# Altium PCB Parallel_CS.PcbDoc (part 1 of 3)
Units mm, origin at the board's own origin, x right, y up, seen from the top; angles counter-clockwise.
Board outline 81.03 x 171.07 mm, 4 copper layers (Top Layer, Ground Plane, Power Plane, Bottom Layer), stack 0.778 mm thick; 393 components, 189 nets, 1068 pads, 234 vias.
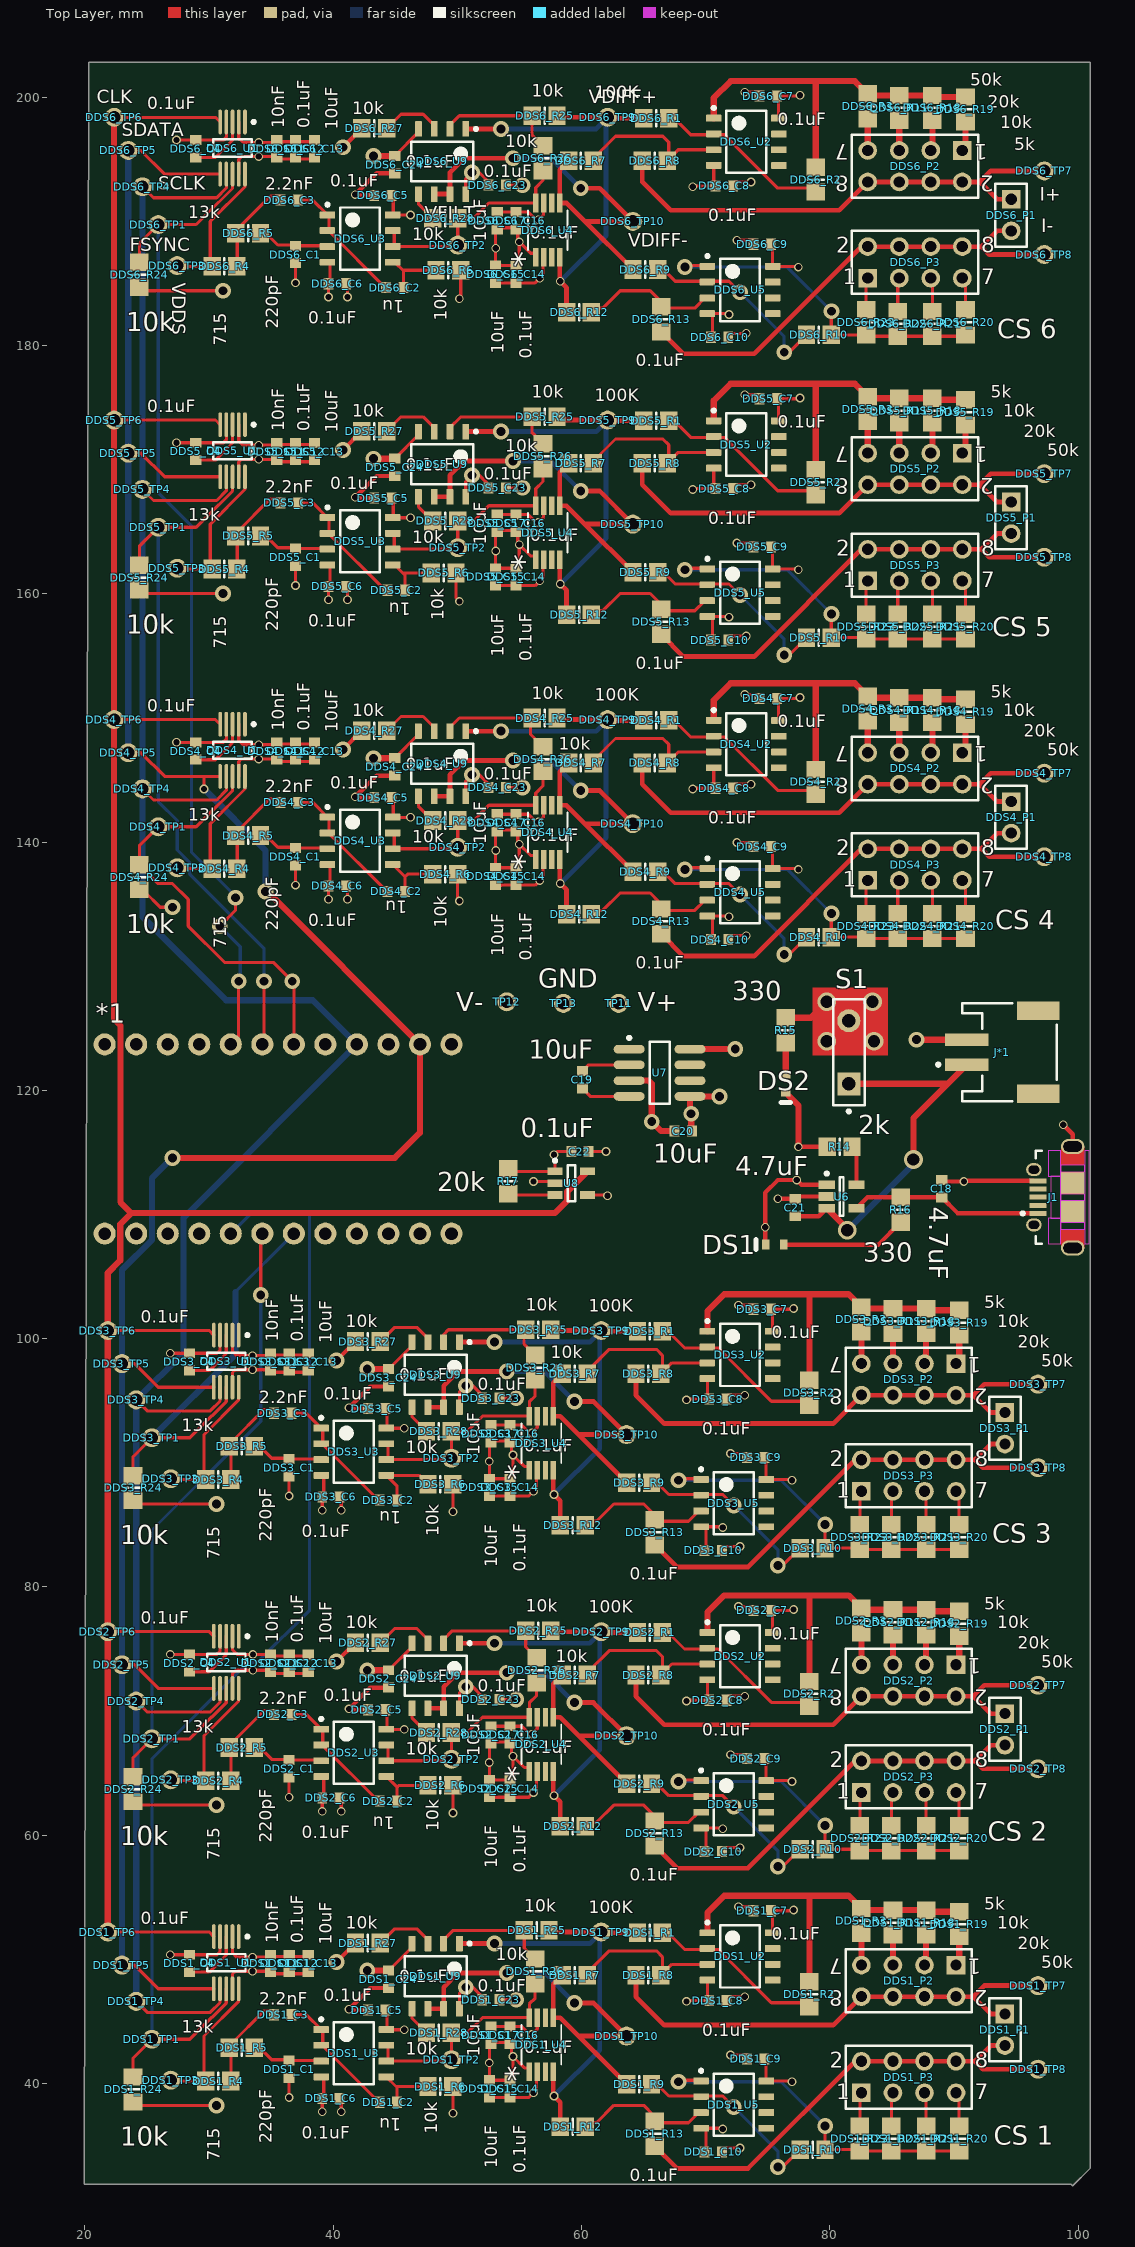
[diagram p0: Top Layer view]
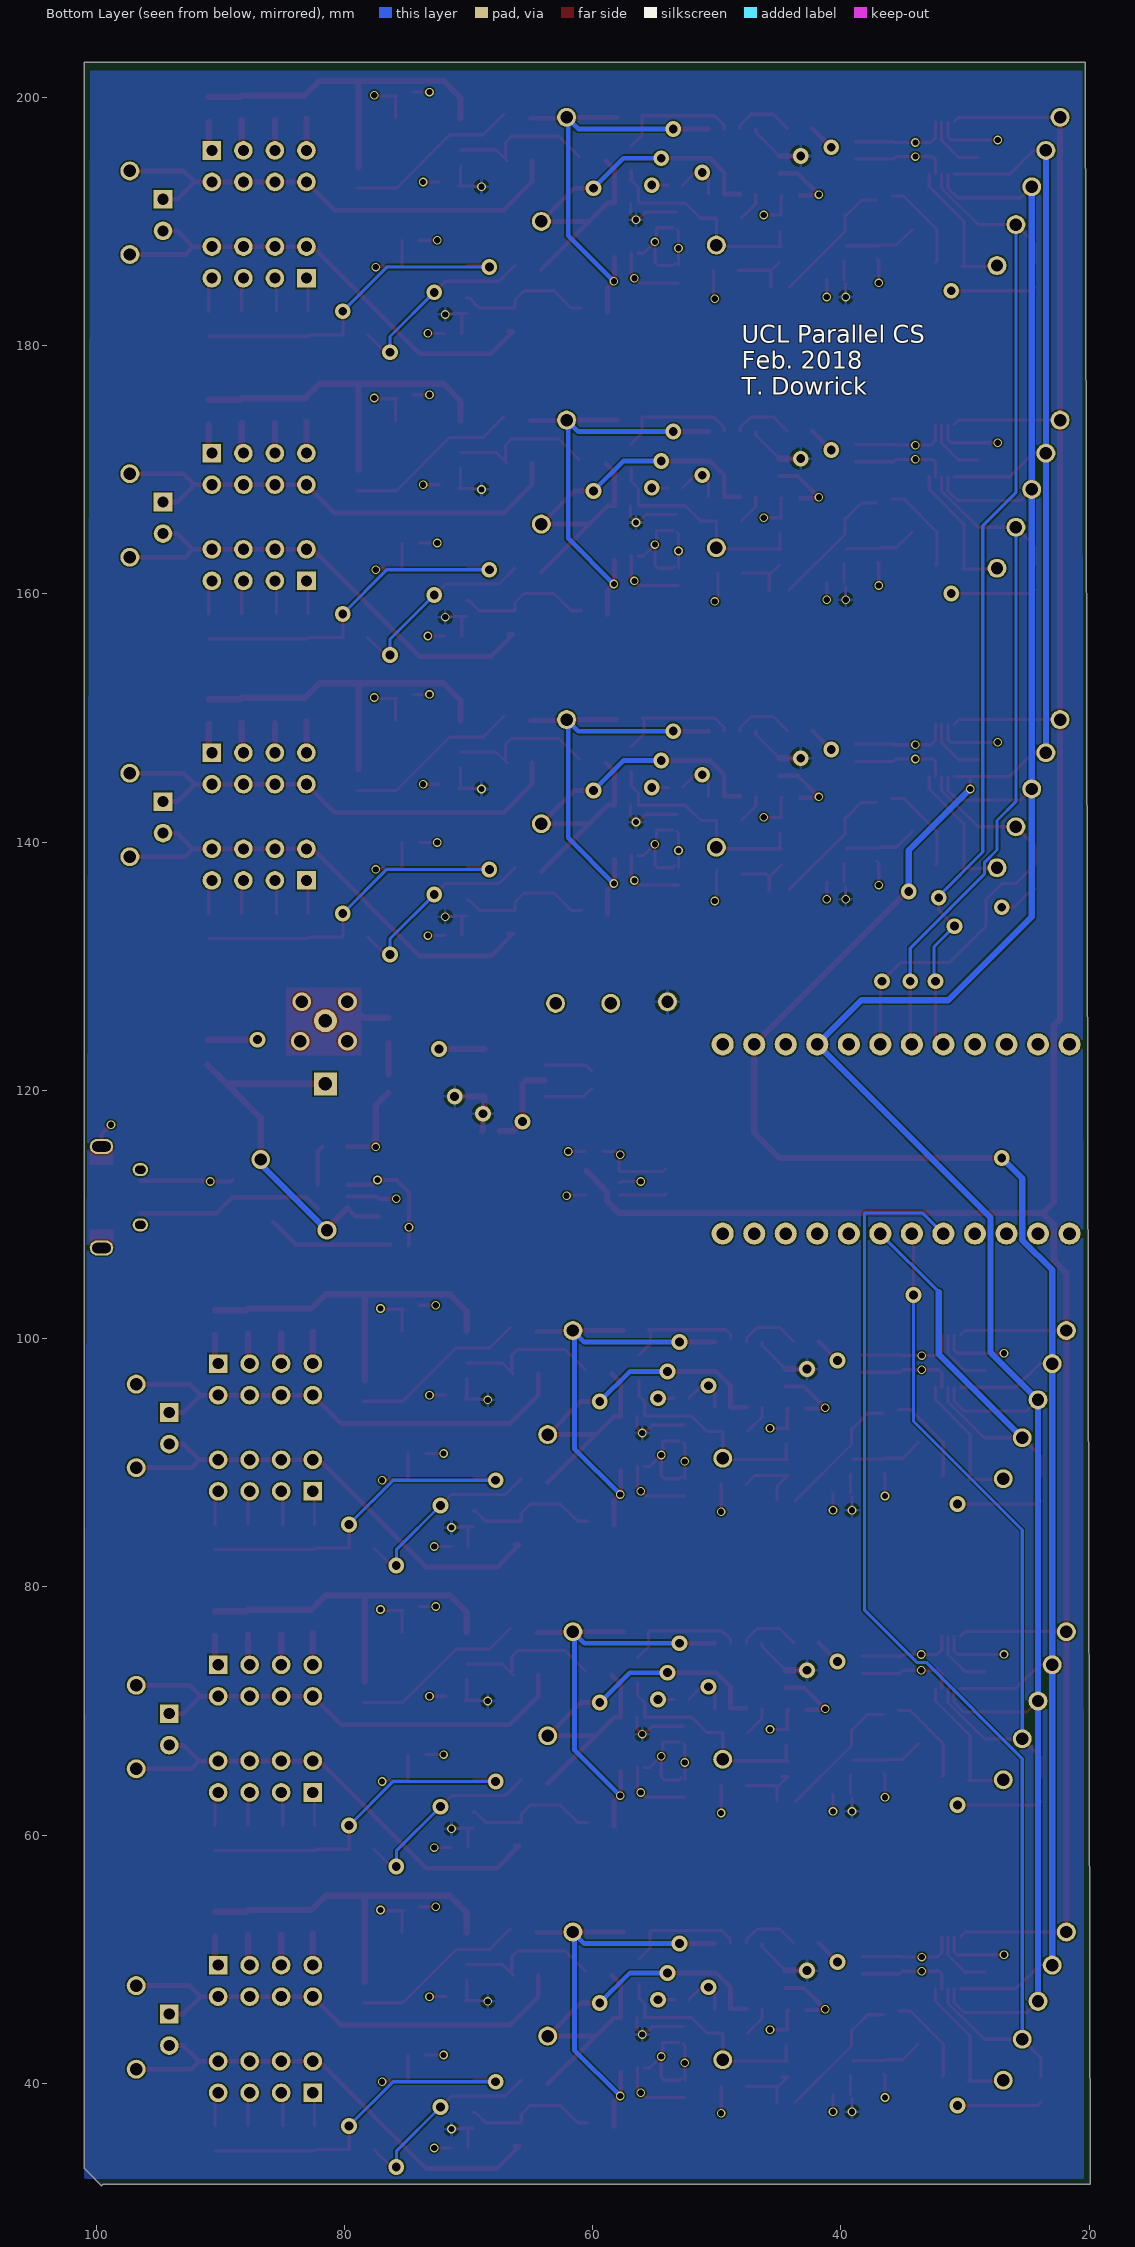
[diagram p1: Bottom Layer view, seen from below]
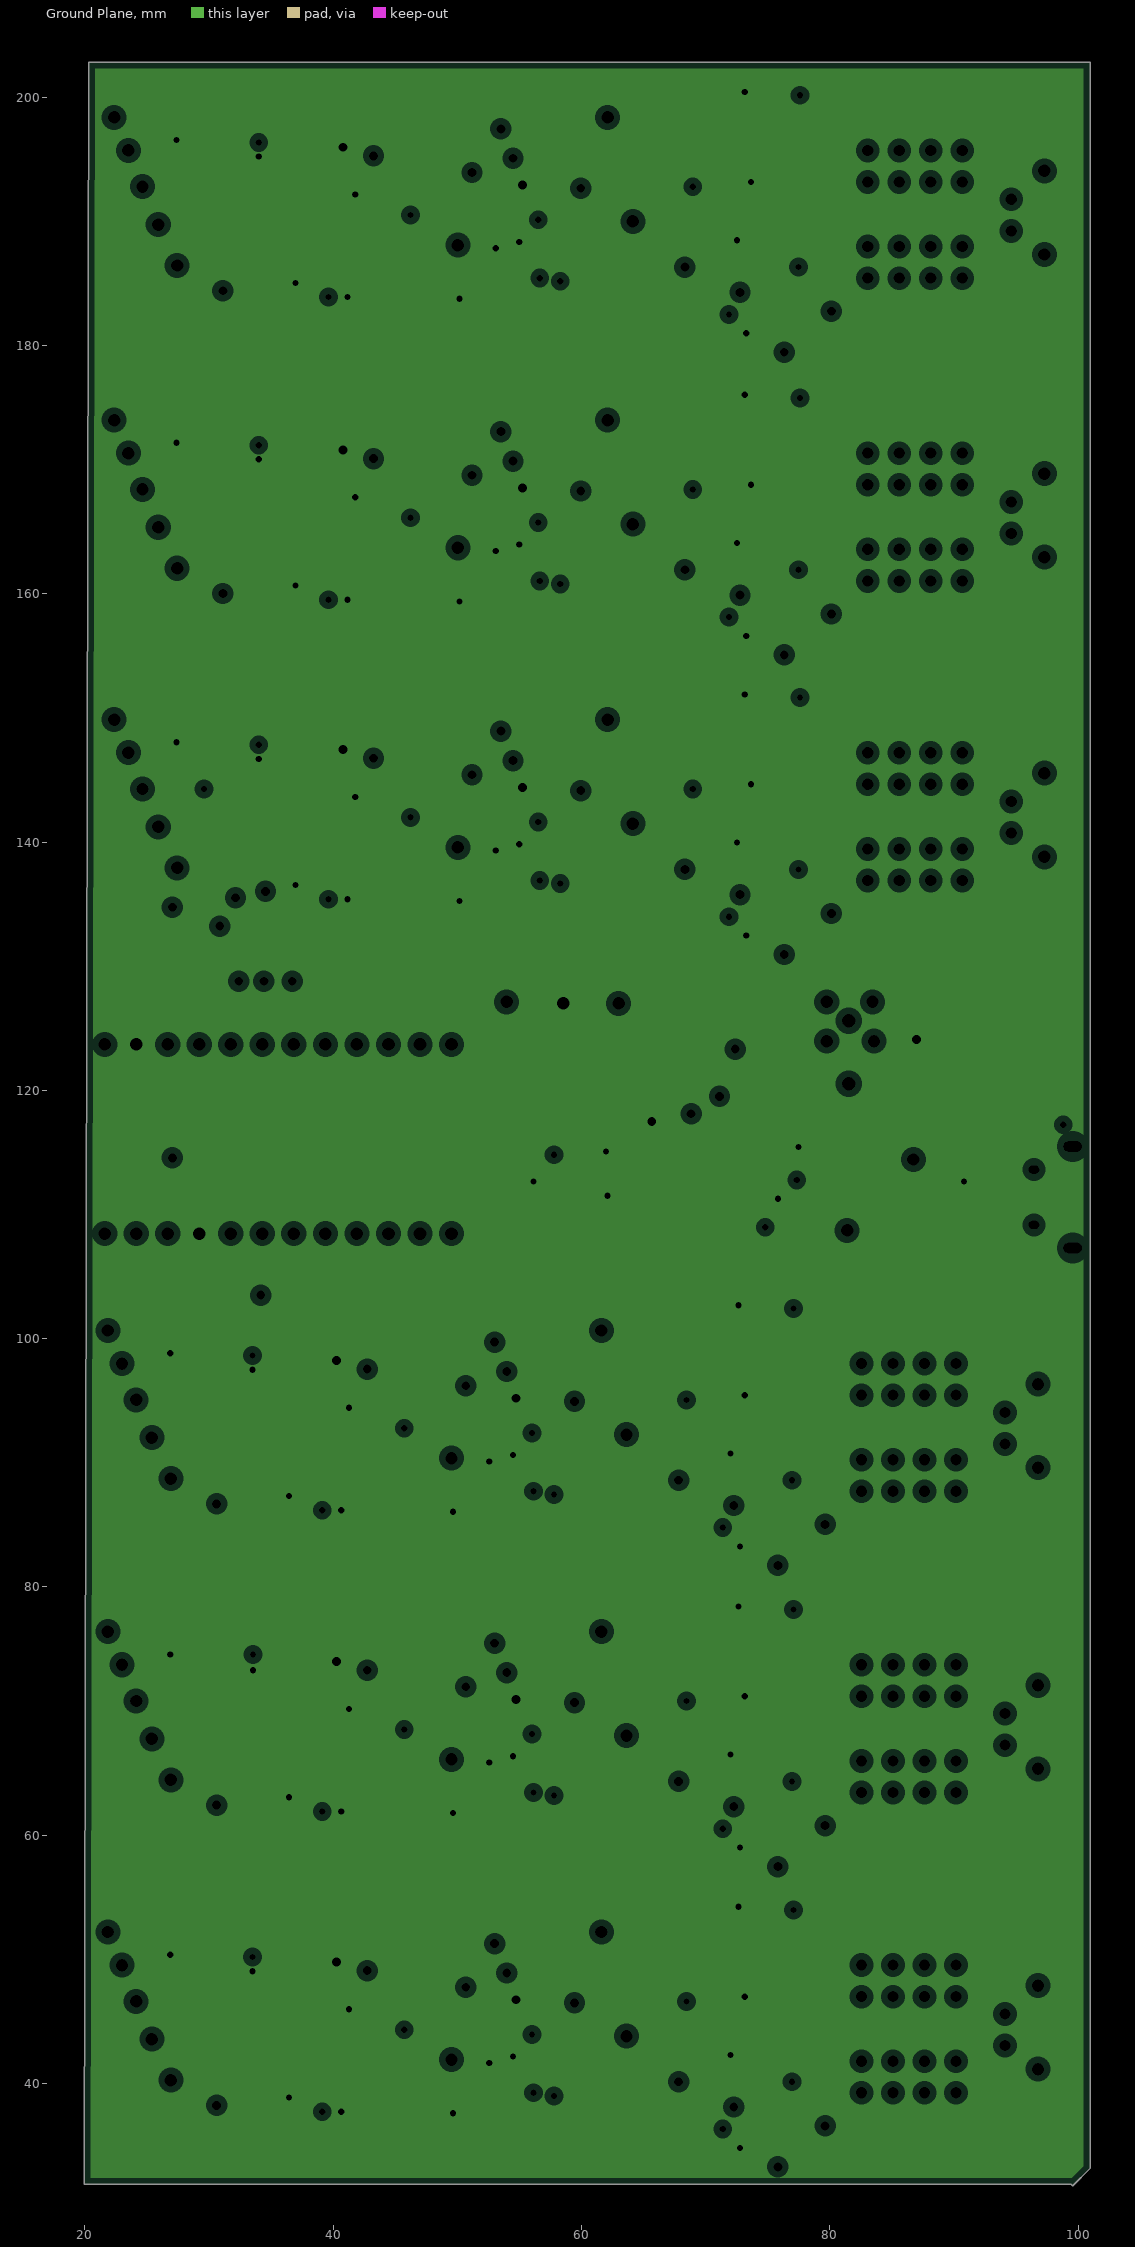
[diagram p2: Ground Plane, clearances drawn from the general rule]
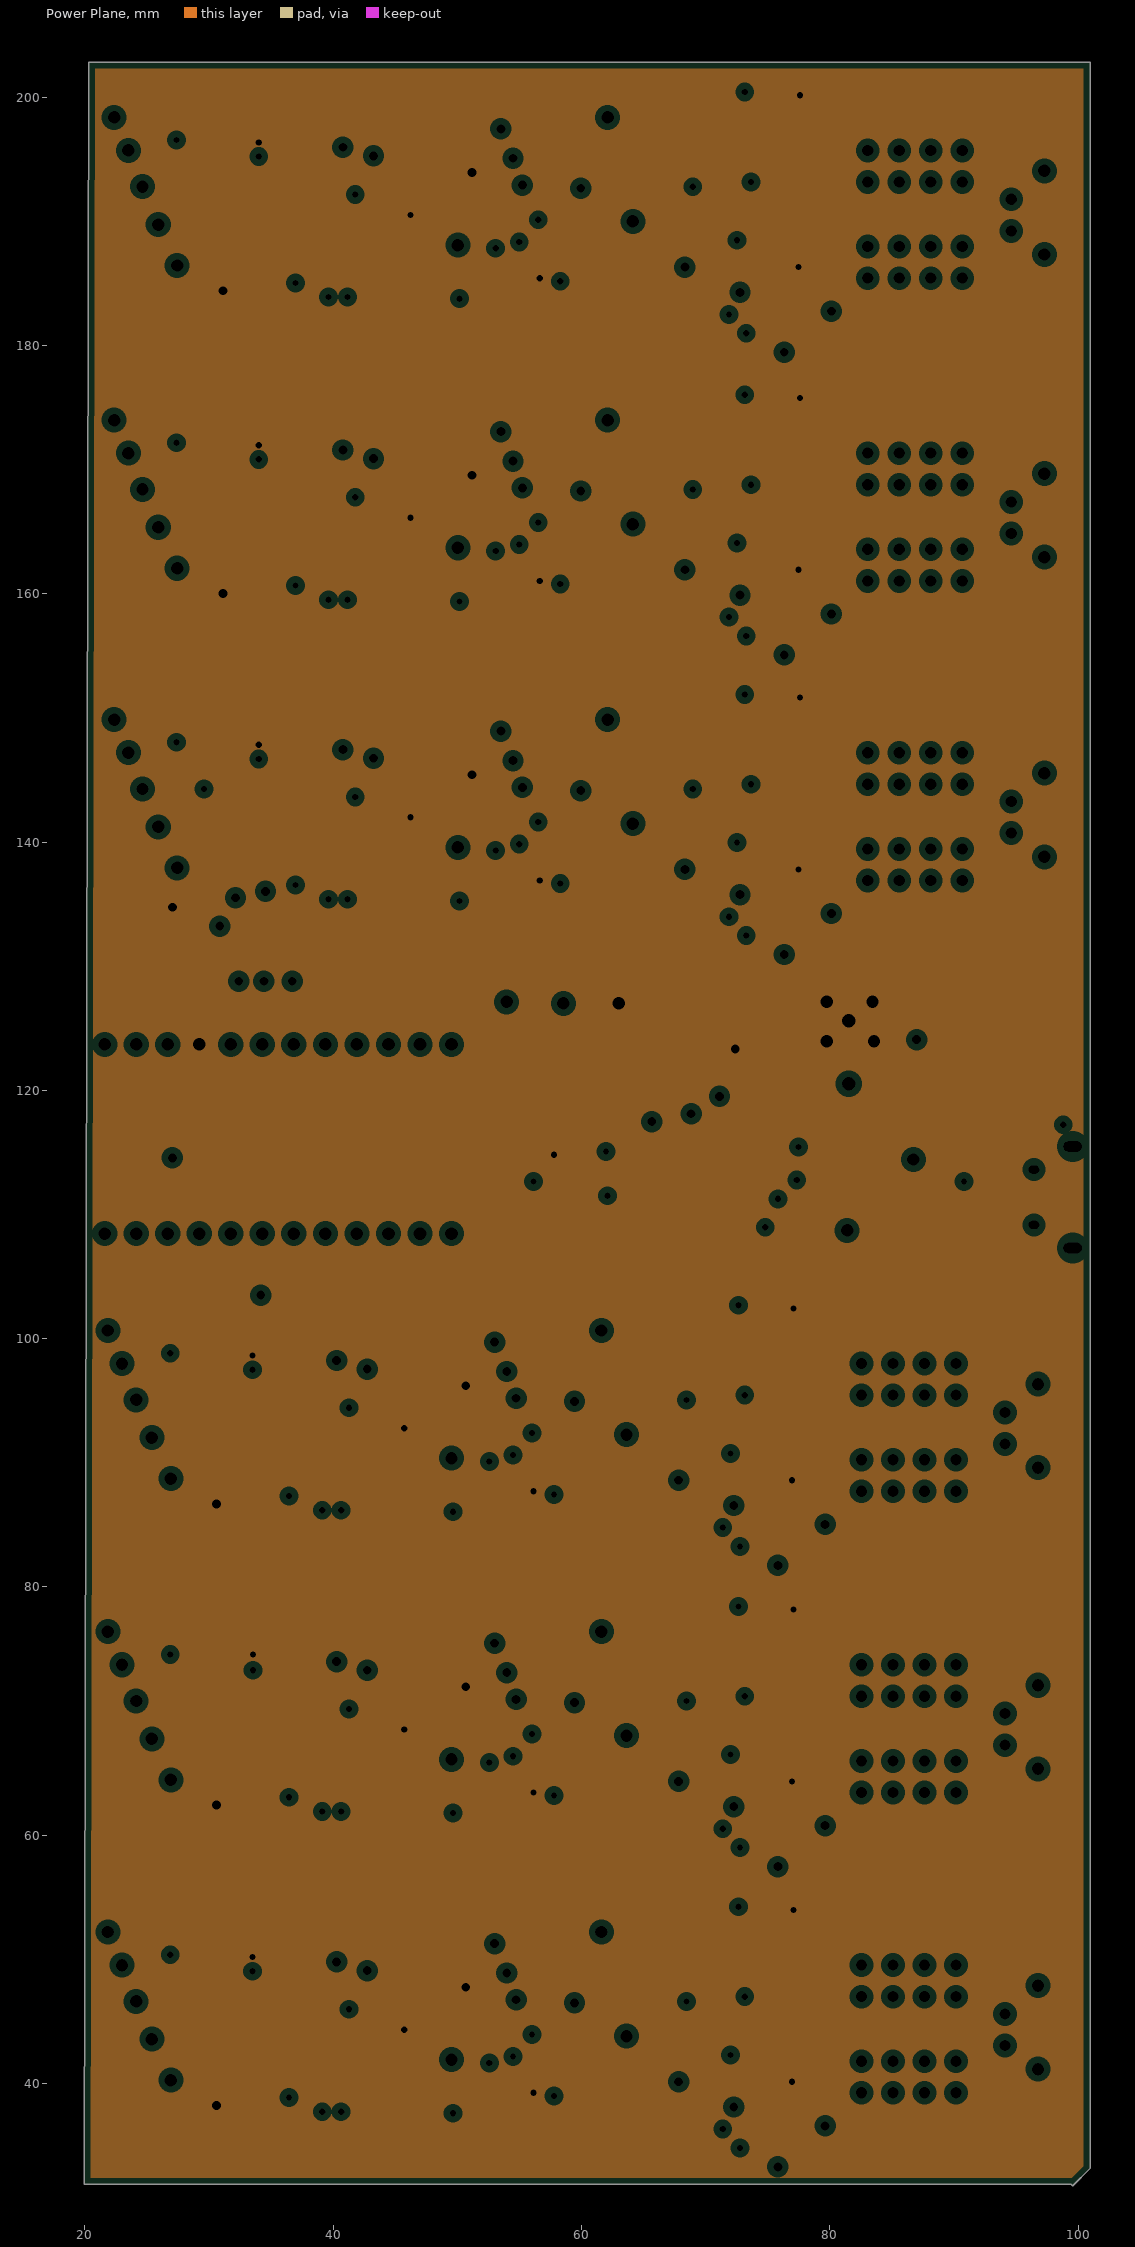
[diagram p3: Power Plane, clearances drawn from the general rule]

## Layer stack, top to bottom
Top Solder: solder mask 0.0102, Solder Resist, Dk 3.5
Top Layer: signal copper 0.0356
Dielectric 1: core 0.254, FR-4, Dk 4.2
Ground Plane: plane copper 0.036, net GND
Dielectric 3: prepreg 0.127, Dk 4.2
Power Plane: plane copper 0.036, net V+
Dielectric 2: core 0.254, Dk 4.2
Bottom Layer: signal copper 0.0356
Bottom Solder: solder mask 0.0102, Solder Resist, Dk 3.5

## Board outline
19.939,31.877 99.441,31.877 99.568,31.75 100.965,33.147 100.965,202.819 20.32,202.819

## Design rules (kind name [scope] priority, off if disabled: settings)
Clearance [All] p1: gap=0.125 ignorepadtopadclearanceinfootprint=FALSE except(0: Arc-Hole Track-Hole SMDPad-Hole THPad-Hole Via-Hole Fill-Hole Poly-Hole Region-Hole Text-Hole)
DiffPairsRouting [All] p1: maxlimit=0.254 minlimit=0.254 mostfreqgap=0.254 toplayer_minwidth=0.381 toplayer_maxwidth=0.381 toplayer_prefwidth=0.381 bottomlayer_minwidth=0.381 bottomlayer_maxwidth=0.381 bottomlayer_prefwidth=0.381 maxuncoupledlength=12.7
PlaneClearance [All] p1: clearance=0.508
PlaneConnect [All] p1: planeconnectstyle=Relief reliefexpansion=0.508 reliefentries=4 reliefconductorwidth=0.254 reliefairgap=0.254
PolygonConnect [All] p1: connectstyle=Relief reliefconductorwidth=0.254 reliefentries=4 polygonreliefangle="90 Angle" airgapwidth=0.254
RoomDefinition DDS5 [InComponentClass('DDS5')] p1: confinementstyle=ConfineIn formatcopy=TRUE lockcomponents=FALSE outline 20.32,154.178 99.949,154.178 99.949,178.308 20.32,178.308
RoomDefinition DDS4 [InComponentClass('DDS4')] p2: confinementstyle=ConfineIn formatcopy=TRUE lockcomponents=FALSE outline 20.32,130.048 99.949,130.048 99.949,154.178 20.32,154.178
RoomDefinition DDS3 [InComponentClass('DDS3')] p3: confinementstyle=ConfineIn formatcopy=TRUE lockcomponents=FALSE outline 19.812,80.837 99.441,80.837 99.441,104.967 19.812,104.967
RoomDefinition DDS2 [InComponentClass('DDS2')] p4: confinementstyle=ConfineIn formatcopy=TRUE lockcomponents=FALSE outline 19.812,56.58 99.441,56.58 99.441,80.71 19.812,80.71
RoomDefinition DDS1 [InComponentClass('DDS1')] p5: confinementstyle=ConfineIn formatcopy=FALSE lockcomponents=FALSE outline 19.812,32.385 99.441,32.385 99.441,56.515 19.812,56.515
RoomDefinition DDS6 [InComponentClass('DDS6')] p6: confinementstyle=ConfineIn formatcopy=TRUE lockcomponents=FALSE outline 20.32,178.562 99.949,178.562 99.949,202.692 20.32,202.692
RoomDefinition U_Power_Supply_and_Buttons [InComponentClass('U_Power_Supply_and_Buttons')] p7: confinementstyle=ConfineIn formatcopy=TRUE lockcomponents=FALSE outline 52.324,104.902 99.822,104.902 99.822,128.905 52.324,128.905
RoomDefinition U_Arduino_and_Clock_Source [InComponentClass('U_Arduino_and_Clock_Source')] p8: confinementstyle=ConfineIn formatcopy=TRUE lockcomponents=FALSE outline 20.066,105.918 62.23,105.918 62.23,127.762 20.066,127.762
RoutingVias [All] p1: holewidth=0.5 width=0.7 viastyle="Through Hole" minholewidth=0.2 minwidth=0.4 maxholewidth=0.711 maxwidth=1.27
SolderMaskExpansion [All] p1: expansion=0.102
UnRoutedNet [All] p1: checkbadconnections=TRUE
Width [All] p1: maxlimit=0.5 minlimit=0.125 preferedwidth=0.254
26 further rules are at their usual default settings.

## Classes and differential pairs
component class DDS6: $(VALUE) DDS6_C1 DDS6_C2 DDS6_C3 DDS6_C4 DDS6_C5 DDS6_C6 DDS6_C7 DDS6_C8 DDS6_C9 DDS6_C10 DDS6_C11 DDS6_C12 DDS6_C13 DDS6_C14 DDS6_C15 DDS6_C16 DDS6_C17 DDS6_C23 DDS6_C24 DDS6_P1 DDS6_P2 DDS6_P3 DDS6_R1 DDS6_R2 DDS6_R3 DDS6_R4 DDS6_R5 DDS6_R6 DDS6_R7 DDS6_R8 DDS6_R9 DDS6_R10 DDS6_R11 DDS6_R12 DDS6_R13 DDS6_R18 DDS6_R19 DDS6_R20 DDS6_R21 DDS6_R22 DDS6_R23 DDS6_R24 DDS6_R25 DDS6_R26 DDS6_R27 DDS6_R28 DDS6_TP1 DDS6_TP2 DDS6_TP3 DDS6_TP4 DDS6_TP5 DDS6_TP6 DDS6_TP7 DDS6_TP8 DDS6_TP9 DDS6_TP10 DDS6_TP_IOUT-1 DDS6_TP_IOUT-2 DDS6_TP_IOUT-3 DDS6_U1 DDS6_U2 DDS6_U3 DDS6_U4 DDS6_U5 DDS6_U9
component class DDS5: DDS5_C1 DDS5_C2 DDS5_C3 DDS5_C4 DDS5_C5 DDS5_C6 DDS5_C7 DDS5_C8 DDS5_C9 DDS5_C10 DDS5_C11 DDS5_C12 DDS5_C13 DDS5_C14 DDS5_C15 DDS5_C16 DDS5_C17 DDS5_C23 DDS5_C24 DDS5_P1 DDS5_P2 DDS5_P3 DDS5_R1 DDS5_R2 DDS5_R3 DDS5_R4 DDS5_R5 DDS5_R6 DDS5_R7 DDS5_R8 DDS5_R9 DDS5_R10 DDS5_R11 DDS5_R12 DDS5_R13 DDS5_R18 DDS5_R19 DDS5_R20 DDS5_R21 DDS5_R22 DDS5_R23 DDS5_R24 DDS5_R25 DDS5_R26 DDS5_R27 DDS5_R28 DDS5_TP1 DDS5_TP2 DDS5_TP3 DDS5_TP4 DDS5_TP5 DDS5_TP6 DDS5_TP7 DDS5_TP8 DDS5_TP9 DDS5_TP10 DDS5_TP_IOUT-1 DDS5_TP_IOUT-2 DDS5_TP_IOUT-3 DDS5_U1 DDS5_U2 DDS5_U3 DDS5_U4 DDS5_U5 DDS5_U9
component class DDS4: DDS4_C1 DDS4_C2 DDS4_C3 DDS4_C4 DDS4_C5 DDS4_C6 DDS4_C7 DDS4_C8 DDS4_C9 DDS4_C10 DDS4_C11 DDS4_C12 DDS4_C13 DDS4_C14 DDS4_C15 DDS4_C16 DDS4_C17 DDS4_C23 DDS4_C24 DDS4_P1 DDS4_P2 DDS4_P3 DDS4_R1 DDS4_R2 DDS4_R3 DDS4_R4 DDS4_R5 DDS4_R6 DDS4_R7 DDS4_R8 DDS4_R9 DDS4_R10 DDS4_R11 DDS4_R12 DDS4_R13 DDS4_R18 DDS4_R19 DDS4_R20 DDS4_R21 DDS4_R22 DDS4_R23 DDS4_R24 DDS4_R25 DDS4_R26 DDS4_R27 DDS4_R28 DDS4_TP1 DDS4_TP2 DDS4_TP3 DDS4_TP4 DDS4_TP5 DDS4_TP6 DDS4_TP7 DDS4_TP8 DDS4_TP9 DDS4_TP10 DDS4_TP_IOUT-1 DDS4_TP_IOUT-2 DDS4_TP_IOUT-3 DDS4_U1 DDS4_U2 DDS4_U3 DDS4_U4 DDS4_U5 DDS4_U9
component class DDS3: DDS3_C1 DDS3_C2 DDS3_C3 DDS3_C4 DDS3_C5 DDS3_C6 DDS3_C7 DDS3_C8 DDS3_C9 DDS3_C10 DDS3_C11 DDS3_C12 DDS3_C13 DDS3_C14 DDS3_C15 DDS3_C16 DDS3_C17 DDS3_C23 DDS3_C24 DDS3_P1 DDS3_P2 DDS3_P3 DDS3_R1 DDS3_R2 DDS3_R3 DDS3_R4 DDS3_R5 DDS3_R6 DDS3_R7 DDS3_R8 DDS3_R9 DDS3_R10 DDS3_R11 DDS3_R12 DDS3_R13 DDS3_R18 DDS3_R19 DDS3_R20 DDS3_R21 DDS3_R22 DDS3_R23 DDS3_R24 DDS3_R25 DDS3_R26 DDS3_R27 DDS3_R28 DDS3_TP1 DDS3_TP2 DDS3_TP3 DDS3_TP4 DDS3_TP5 DDS3_TP6 DDS3_TP7 DDS3_TP8 DDS3_TP9 DDS3_TP10 DDS3_TP_IOUT-1 DDS3_TP_IOUT-2 DDS3_TP_IOUT-3 DDS3_U1 DDS3_U2 DDS3_U3 DDS3_U4 DDS3_U5 DDS3_U9
component class DDS1: DDS1_C1 DDS1_C2 DDS1_C3 DDS1_C4 DDS1_C5 DDS1_C6 DDS1_C7 DDS1_C8 DDS1_C9 DDS1_C10 DDS1_C11 DDS1_C12 DDS1_C13 DDS1_C14 DDS1_C15 DDS1_C16 DDS1_C17 DDS1_C23 DDS1_C24 DDS1_P1 DDS1_P2 DDS1_P3 DDS1_R1 DDS1_R2 DDS1_R3 DDS1_R4 DDS1_R5 DDS1_R6 DDS1_R7 DDS1_R8 DDS1_R9 DDS1_R10 DDS1_R11 DDS1_R12 DDS1_R13 DDS1_R18 DDS1_R19 DDS1_R20 DDS1_R21 DDS1_R22 DDS1_R23 DDS1_R24 DDS1_R25 DDS1_R26 DDS1_R27 DDS1_R28 DDS1_TP1 DDS1_TP2 DDS1_TP3 DDS1_TP4 DDS1_TP5 DDS1_TP6 DDS1_TP7 DDS1_TP8 DDS1_TP9 DDS1_TP10 DDS1_TP_IOUT-1 DDS1_TP_IOUT-2 DDS1_TP_IOUT-3 DDS1_U1 DDS1_U2 DDS1_U3 DDS1_U4 DDS1_U5 DDS1_U9
component class DDS2: DDS2_C1 DDS2_C2 DDS2_C3 DDS2_C4 DDS2_C5 DDS2_C6 DDS2_C7 DDS2_C8 DDS2_C9 DDS2_C10 DDS2_C11 DDS2_C12 DDS2_C13 DDS2_C14 DDS2_C15 DDS2_C16 DDS2_C17 DDS2_C23 DDS2_C24 DDS2_P1 DDS2_P2 DDS2_P3 DDS2_R1 DDS2_R2 DDS2_R3 DDS2_R4 DDS2_R5 DDS2_R6 DDS2_R7 DDS2_R8 DDS2_R9 DDS2_R10 DDS2_R11 DDS2_R12 DDS2_R13 DDS2_R18 DDS2_R19 DDS2_R20 DDS2_R21 DDS2_R22 DDS2_R23 DDS2_R24 DDS2_R25 DDS2_R26 DDS2_R27 DDS2_R28 DDS2_TP1 DDS2_TP2 DDS2_TP3 DDS2_TP4 DDS2_TP5 DDS2_TP6 DDS2_TP7 DDS2_TP8 DDS2_TP9 DDS2_TP10 DDS2_TP_IOUT-1 DDS2_TP_IOUT-2 DDS2_TP_IOUT-3 DDS2_U1 DDS2_U2 DDS2_U3 DDS2_U4 DDS2_U5 DDS2_U9
component class U_Arduino_and_Clock_Source: *1 C22 R17 U8
component class U_Power_Supply_and_Buttons: C18 C19 C20 C21 DS1 DS2 J1 J*1 R14 R15 R16 S1 TP11 TP12 TP13 U6 U7
net class SPI_FSYNC[1..6]: SPI_FSYNC1 SPI_FSYNC2 SPI_FSYNC3 SPI_FSYNC4 SPI_FSYNC5 SPI_FSYNC6
channel class AD9833_Diff_Output_Current_Source: DDS1 DDS2 DDS3 DDS4 DDS5 DDS6
differential pair DDS6_VDIFF: +DDS6_VDIFF_P -DDS6_VDIFF_N
differential pair DDS6_I_OUT: +DDS6_I_OUT_P -DDS6_I_OUT_N
differential pair DDS5_VDIFF: +DDS5_VDIFF_P -DDS5_VDIFF_N
differential pair DDS5_I_OUT: +DDS5_I_OUT_P -DDS5_I_OUT_N
differential pair DDS4_VDIFF: +DDS4_VDIFF_P -DDS4_VDIFF_N
differential pair DDS4_I_OUT: +DDS4_I_OUT_P -DDS4_I_OUT_N
differential pair DDS3_VDIFF: +DDS3_VDIFF_P -DDS3_VDIFF_N
differential pair DDS3_I_OUT: +DDS3_I_OUT_P -DDS3_I_OUT_N
differential pair DDS1_I_OUT: +DDS1_I_OUT_P -DDS1_I_OUT_N
differential pair DDS1_VDIFF: +DDS1_VDIFF_P -DDS1_VDIFF_N
differential pair DDS2_I_OUT: +DDS2_I_OUT_P -DDS2_I_OUT_N
differential pair DDS2_VDIFF: +DDS2_VDIFF_P -DDS2_VDIFF_N

## Components (designator, comment, footprint, x,y, rotation, side; value= is the part's Value field where it differs from the comment)
*1 "Pro_Micro" Pro_Micro 176.53,108.458 r90 top
C18 "4.7uF" 1608[0603] 89.027,112.076 r270 top
C19 "10uF" 1608[0603] 60.071,120.842 r90 top
C20 "10uF" 1608[0603] 68.199,116.713 r0 top
C21 "4.7uF" 1608[0603] 77.216,110.555 r270 top
C22 "0.1uF" 1608[0603] 59.879,115.062 r180 top
DDS1_C1 "220pF" 1608[0603] 36.449,41.148 r90 top (schematic designator C1)
DDS1_C2 "1u" 1608[0603] 44.45,38.481 r0 top (schematic designator C2)
DDS1_C3 "2.2nF" 1608[0603] 35.941,45.528 r180 top (schematic designator C3)
DDS1_C4 "0.1uF" 1608[0603] 28.418,49.666 r270 top (schematic designator C4)
DDS1_C5 "0.1uF" 1608[0603] 43.499,45.909 r0 top (schematic designator C5)
DDS1_C6 "0.1uF" 1608[0603] 39.816,38.797 r180 top (schematic designator C6)
DDS1_C7 "0.1uF" 1608[0603] 74.549,53.91 r0 top (schematic designator C7)
DDS1_C8 "0.1uF" 1608[0603] 70.993,46.671 r180 top (schematic designator C8)
DDS1_C9 "0.1uF" 1608[0603] 74.041,41.972 r0 top (schematic designator C9)
DDS1_C10 "0.1uF" 1608[0603] 70.612,34.479 r180 top (schematic designator C10)
DDS1_C11 "10nF" 1608[0603] 34.941,49.663 r90 top (schematic designator C11)
DDS1_C12 "0.1uF" 1608[0603] 36.465,49.663 r90 top (schematic designator C12)
DDS1_C13 "10uF" 1608[0603] 37.989,49.663 r90 top (schematic designator C13)
DDS1_C14 "0.1uF" 1608[0603] 54.229,39.559 r270 top (schematic designator C14)
DDS1_C15 "10uF" 1608[0603] 52.578,39.559 r270 top (schematic designator C15)
DDS1_C16 "0.1uF" 1608[0603] 54.229,43.877 r90 top (schematic designator C16)
DDS1_C17 "10uF" 1608[0603] 52.705,43.877 r90 top (schematic designator C17)
DDS1_C23 "0.1uF" 1608[0603] 52.705,46.736 r180 top (schematic designator C23)
DDS1_C24 "0.1uF" 1608[0603] 44.45,48.387 r90 top (schematic designator C24)
DDS1_P1 "Header 2" HDR1X2 94.107,45.593 r270 top (schematic designator P1)
DDS1_P2 "Header 4X2" HDR2X4 90.17,49.53 r180 top (schematic designator P2)
DDS1_P3 "Header 4X2" HDR2X4 82.55,39.243 r0 top (schematic designator P3)
DDS1_R1 "100K" 6-0805_M 65.516,52.132 r0 top (schematic designator R1)
DDS1_R2 "100K" 6-0805_M 78.359,47.179 r90 top (schematic designator R2)
DDS1_R3 "50k" 6-0805_M 82.55,53.086 r90 top (schematic designator R3)
DDS1_R4 "715" 6-0805_M 30.734,40.194 r0 top (schematic designator R4)
DDS1_R5 "13k" 6-0805_M 32.639,42.861 r0 top (schematic designator R5)
DDS1_R6 "10k" 6-0805_M 48.641,39.751 r180 top (schematic designator R6)
DDS1_R7 "100K" 6-0805_M 59.452,48.703 r0 top (schematic designator R7)
DDS1_R8 "100K" 6-0805_M 65.389,48.703 r180 top (schematic designator R8)
DDS1_R9 "100K" 6-0805_M 64.643,39.94 r0 top (schematic designator R9)
DDS1_R10 "100K" 6-0805_M 78.613,34.671 r0 top (schematic designator R10)
DDS1_R11 "20k" 6-0805_M 85.09,52.959 r270 top (schematic designator R11)
DDS1_R12 "100K" 6-0805_M 59.293,36.511 r0 top (schematic designator R12)
DDS1_R13 "100K" 6-0805_M 65.913,35.941 r270 top (schematic designator R13)
DDS1_R18 "10k" 6-0805_M 87.757,52.959 r270 top (schematic designator R18)
DDS1_R19 "5k" 6-0805_M 90.424,52.832 r270 top (schematic designator R19)
DDS1_R20 "5k" 6-0805_M 90.424,35.56 r90 top (schematic designator R20)
DDS1_R21 "10k" 6-0805_M 87.757,35.56 r90 top (schematic designator R21)
DDS1_R22 "20k" 6-0805_M 84.963,35.56 r90 top (schematic designator R22)
DDS1_R23 "50k" 6-0805_M 82.423,35.56 r270 top (schematic designator R23)
DDS1_R24 "10k" 6-0805_M 23.876,39.513 r270 top (schematic designator R24)
DDS1_R25 "10k" 6-0805_M 56.388,52.324 r180 top (schematic designator R25)
DDS1_R26 "10k" 6-0805_M 56.261,49.022 r270 top (schematic designator R26)
DDS1_R27 "10k" 6-0805_M 42.799,51.308 r180 top (schematic designator R27)
DDS1_R28 "10k" 6-0805_M 48.514,44.069 r0 top (schematic designator R28)
DDS1_TP1 "TESTPOINT_WHITE" TestPointVia 25.4,43.561 r90 top (schematic designator TP1)
DDS1_TP2 "TESTPOINT_WHITE" TestPointVia 49.53,41.91 r90 top (schematic designator TP2)
DDS1_TP3 "TESTPOINT_WHITE" TestPointVia 26.924,40.259 r90 top (schematic designator TP3)
DDS1_TP4 "TESTPOINT_WHITE" TestPointVia 24.13,46.609 r0 top (schematic designator TP4)
DDS1_TP5 "TESTPOINT_WHITE" TestPointVia 22.987,49.53 r0 top (schematic designator TP5)
DDS1_TP6 "TESTPOINT_WHITE" TestPointVia 21.844,52.197 r0 top (schematic designator TP6)
DDS1_TP7 "TESTPOINT_WHITE" TestPointVia 96.774,47.879 r90 top (schematic designator TP7)
DDS1_TP8 "TESTPOINT_WHITE" TestPointVia 96.774,41.148 r90 top (schematic designator TP8)
DDS1_TP9 "TESTPOINT_WHITE" TestPointVia 61.595,52.197 r90 top (schematic designator TP9)
DDS1_TP10 "TESTPOINT_WHITE" TestPointVia 63.627,43.815 r90 top (schematic designator TP10)
DDS1_U1 "AD9833BRMZ" ADI-RM-10_M 31.385,49.725 r270 top (schematic designator U1)
DDS1_U2 "OPA2188AIDR" D0008A_L 72.771,50.227 r0 top (schematic designator U2)
DDS1_U3 "OPA2188AIDR" D0008A_L 41.656,42.434 r0 top (schematic designator U3)
DDS1_U4 "AD8476ARMZ" SOP65P490X110-8N 56.769,43.115 r90 top (schematic designator U4)
DDS1_U5 "OPA2188AIDR" D0008A_L 72.263,38.289 r0 top (schematic designator U5)
DDS1_U9 "OPA2188AIDR" D0008A_L 48.26,48.641 r270 top (schematic designator U9)
DDS2_C1 "220pF" 1608[0603] 36.449,65.343 r90 top (schematic designator C1)
DDS2_C2 "1u" 1608[0603] 44.45,62.738 r0 top (schematic designator C2)
DDS2_C3 "2.2nF" 1608[0603] 35.941,69.723 r180 top (schematic designator C3)
DDS2_C4 "0.1uF" 1608[0603] 28.418,73.861 r270 top (schematic designator C4)
DDS2_C5 "0.1uF" 1608[0603] 43.499,70.104 r0 top (schematic designator C5)
DDS2_C6 "0.1uF" 1608[0603] 39.816,62.992 r180 top (schematic designator C6)
DDS2_C7 "0.1uF" 1608[0603] 74.549,78.105 r0 top (schematic designator C7)
DDS2_C8 "0.1uF" 1608[0603] 70.993,70.866 r180 top (schematic designator C8)
DDS2_C9 "0.1uF" 1608[0603] 74.041,66.167 r0 top (schematic designator C9)
DDS2_C10 "0.1uF" 1608[0603] 70.612,58.674 r180 top (schematic designator C10)
DDS2_C11 "10nF" 1608[0603] 34.941,73.858 r90 top (schematic designator C11)
DDS2_C12 "0.1uF" 1608[0603] 36.465,73.858 r90 top (schematic designator C12)
DDS2_C13 "10uF" 1608[0603] 37.989,73.858 r90 top (schematic designator C13)
DDS2_C14 "0.1uF" 1608[0603] 54.229,63.754 r270 top (schematic designator C14)
DDS2_C15 "10uF" 1608[0603] 52.578,63.754 r270 top (schematic designator C15)
DDS2_C16 "0.1uF" 1608[0603] 54.229,68.072 r90 top (schematic designator C16)
DDS2_C17 "10uF" 1608[0603] 52.705,68.072 r90 top (schematic designator C17)
DDS2_C23 "0.1uF" 1608[0603] 52.705,70.931 r180 top (schematic designator C23)
DDS2_C24 "0.1uF" 1608[0603] 44.45,72.582 r90 top (schematic designator C24)
DDS2_P1 "Header 2" HDR1X2 94.107,69.788 r270 top (schematic designator P1)
DDS2_P2 "Header 4X2" HDR2X4 90.17,73.725 r180 top (schematic designator P2)
DDS2_P3 "Header 4X2" HDR2X4 82.55,63.438 r0 top (schematic designator P3)
DDS2_R1 "100K" 6-0805_M 65.516,76.327 r0 top (schematic designator R1)
DDS2_R2 "100K" 6-0805_M 78.359,71.374 r90 top (schematic designator R2)
DDS2_R3 "50k" 6-0805_M 82.55,77.281 r90 top (schematic designator R3)
DDS2_R4 "715" 6-0805_M 30.734,64.389 r0 top (schematic designator R4)
DDS2_R5 "13k" 6-0805_M 32.639,67.056 r0 top (schematic designator R5)
DDS2_R6 "10k" 6-0805_M 48.641,64.008 r180 top (schematic designator R6)
DDS2_R7 "100K" 6-0805_M 59.452,72.898 r0 top (schematic designator R7)
DDS2_R8 "100K" 6-0805_M 65.389,72.898 r180 top (schematic designator R8)
DDS2_R9 "100K" 6-0805_M 64.643,64.135 r0 top (schematic designator R9)
DDS2_R10 "100K" 6-0805_M 78.613,58.866 r0 top (schematic designator R10)
DDS2_R11 "20k" 6-0805_M 85.09,77.154 r270 top (schematic designator R11)
DDS2_R12 "100K" 6-0805_M 59.293,60.706 r0 top (schematic designator R12)
DDS2_R13 "100K" 6-0805_M 65.913,60.136 r270 top (schematic designator R13)
DDS2_R18 "10k" 6-0805_M 87.757,77.154 r270 top (schematic designator R18)
DDS2_R19 "5k" 6-0805_M 90.424,77.027 r270 top (schematic designator R19)
DDS2_R20 "5k" 6-0805_M 90.424,59.755 r90 top (schematic designator R20)
DDS2_R21 "10k" 6-0805_M 87.757,59.755 r90 top (schematic designator R21)
DDS2_R22 "20k" 6-0805_M 84.963,59.755 r90 top (schematic designator R22)
DDS2_R23 "50k" 6-0805_M 82.423,59.755 r270 top (schematic designator R23)
DDS2_R24 "10k" 6-0805_M 23.876,63.708 r270 top (schematic designator R24)
DDS2_R25 "10k" 6-0805_M 56.515,76.454 r180 top (schematic designator R25)
DDS2_R26 "10k" 6-0805_M 56.388,73.279 r270 top (schematic designator R26)
DDS2_R27 "10k" 6-0805_M 42.799,75.503 r180 top (schematic designator R27)
DDS2_R28 "10k" 6-0805_M 48.514,68.264 r0 top (schematic designator R28)
DDS2_TP1 "TESTPOINT_WHITE" TestPointVia 25.4,67.756 r90 top (schematic designator TP1)
DDS2_TP2 "TESTPOINT_WHITE" TestPointVia 49.53,66.105 r90 top (schematic designator TP2)
DDS2_TP3 "TESTPOINT_WHITE" TestPointVia 26.924,64.454 r90 top (schematic designator TP3)
DDS2_TP4 "TESTPOINT_WHITE" TestPointVia 24.13,70.804 r0 top (schematic designator TP4)
DDS2_TP5 "TESTPOINT_WHITE" TestPointVia 22.987,73.725 r0 top (schematic designator TP5)
DDS2_TP6 "TESTPOINT_WHITE" TestPointVia 21.844,76.392 r0 top (schematic designator TP6)
DDS2_TP7 "TESTPOINT_WHITE" TestPointVia 96.774,72.074 r90 top (schematic designator TP7)
DDS2_TP8 "TESTPOINT_WHITE" TestPointVia 96.774,65.343 r90 top (schematic designator TP8)
DDS2_TP9 "TESTPOINT_WHITE" TestPointVia 61.595,76.392 r90 top (schematic designator TP9)
DDS2_TP10 "TESTPOINT_WHITE" TestPointVia 63.627,68.01 r90 top (schematic designator TP10)
DDS2_U1 "AD9833BRMZ" ADI-RM-10_M 31.385,73.92 r270 top (schematic designator U1)
DDS2_U2 "OPA2188AIDR" D0008A_L 72.771,74.422 r0 top (schematic designator U2)
DDS2_U3 "OPA2188AIDR" D0008A_L 41.656,66.629 r0 top (schematic designator U3)
DDS2_U4 "AD8476ARMZ" SOP65P490X110-8N 56.769,67.31 r90 top (schematic designator U4)
DDS2_U5 "OPA2188AIDR" D0008A_L 72.263,62.484 r0 top (schematic designator U5)
DDS2_U9 "OPA2188AIDR" D0008A_L 48.26,72.836 r270 top (schematic designator U9)
DDS3_C1 "220pF" 1608[0603] 36.449,89.6 r90 top (schematic designator C1)
DDS3_C2 "1u" 1608[0603] 44.45,86.995 r0 top (schematic designator C2)
DDS3_C3 "2.2nF" 1608[0603] 35.941,93.98 r180 top (schematic designator C3)
DDS3_C4 "0.1uF" 1608[0603] 28.418,98.118 r270 top (schematic designator C4)
DDS3_C5 "0.1uF" 1608[0603] 43.499,94.361 r0 top (schematic designator C5)
DDS3_C6 "0.1uF" 1608[0603] 39.816,87.249 r180 top (schematic designator C6)
DDS3_C7 "0.1uF" 1608[0603] 74.549,102.362 r0 top (schematic designator C7)
DDS3_C8 "0.1uF" 1608[0603] 70.993,95.123 r180 top (schematic designator C8)
DDS3_C9 "0.1uF" 1608[0603] 74.041,90.424 r0 top (schematic designator C9)
DDS3_C10 "0.1uF" 1608[0603] 70.612,82.931 r180 top (schematic designator C10)
DDS3_C11 "10nF" 1608[0603] 34.941,98.115 r90 top (schematic designator C11)
DDS3_C12 "0.1uF" 1608[0603] 36.465,98.115 r90 top (schematic designator C12)
DDS3_C13 "10uF" 1608[0603] 37.989,98.115 r90 top (schematic designator C13)
DDS3_C14 "0.1uF" 1608[0603] 54.229,88.011 r270 top (schematic designator C14)
DDS3_C15 "10uF" 1608[0603] 52.578,88.011 r270 top (schematic designator C15)
DDS3_C16 "0.1uF" 1608[0603] 54.229,92.329 r90 top (schematic designator C16)
DDS3_C17 "10uF" 1608[0603] 52.705,92.329 r90 top (schematic designator C17)
DDS3_C23 "0.1uF" 1608[0603] 52.705,95.188 r180 top (schematic designator C23)
DDS3_C24 "0.1uF" 1608[0603] 44.45,96.839 r90 top (schematic designator C24)
DDS3_P1 "Header 2" HDR1X2 94.107,94.045 r270 top (schematic designator P1)
DDS3_P2 "Header 4X2" HDR2X4 90.17,97.982 r180 top (schematic designator P2)
DDS3_P3 "Header 4X2" HDR2X4 82.55,87.695 r0 top (schematic designator P3)
DDS3_R1 "100K" 6-0805_M 65.516,100.584 r0 top (schematic designator R1)
DDS3_R2 "100K" 6-0805_M 78.359,95.631 r90 top (schematic designator R2)
DDS3_R3 "50k" 6-0805_M 82.55,101.538 r90 top (schematic designator R3)
DDS3_R4 "715" 6-0805_M 30.734,88.646 r0 top (schematic designator R4)
DDS3_R5 "13k" 6-0805_M 32.639,91.313 r0 top (schematic designator R5)
DDS3_R6 "10k" 6-0805_M 48.641,88.265 r180 top (schematic designator R6)
DDS3_R7 "100K" 6-0805_M 59.452,97.155 r0 top (schematic designator R7)
DDS3_R8 "100K" 6-0805_M 65.389,97.155 r180 top (schematic designator R8)
DDS3_R9 "100K" 6-0805_M 64.643,88.392 r0 top (schematic designator R9)
DDS3_R10 "100K" 6-0805_M 78.613,83.123 r0 top (schematic designator R10)
DDS3_R11 "20k" 6-0805_M 85.09,101.411 r270 top (schematic designator R11)
DDS3_R12 "100K" 6-0805_M 59.293,84.963 r0 top (schematic designator R12)
DDS3_R13 "100K" 6-0805_M 65.913,84.393 r270 top (schematic designator R13)
DDS3_R18 "10k" 6-0805_M 87.757,101.411 r270 top (schematic designator R18)
DDS3_R19 "5k" 6-0805_M 90.424,101.284 r270 top (schematic designator R19)
DDS3_R20 "5k" 6-0805_M 90.424,84.012 r90 top (schematic designator R20)
DDS3_R21 "10k" 6-0805_M 87.757,84.012 r90 top (schematic designator R21)
DDS3_R22 "20k" 6-0805_M 84.963,84.012 r90 top (schematic designator R22)
DDS3_R23 "50k" 6-0805_M 82.423,84.012 r270 top (schematic designator R23)
DDS3_R24 "10k" 6-0805_M 23.876,87.965 r270 top (schematic designator R24)
DDS3_R25 "10k" 6-0805_M 56.515,100.711 r180 top (schematic designator R25)
DDS3_R26 "10k" 6-0805_M 56.261,97.663 r270 top (schematic designator R26)
DDS3_R27 "10k" 6-0805_M 42.799,99.76 r180 top (schematic designator R27)
DDS3_R28 "10k" 6-0805_M 48.514,92.521 r0 top (schematic designator R28)
DDS3_TP1 "TESTPOINT_WHITE" TestPointVia 25.4,92.013 r90 top (schematic designator TP1)
DDS3_TP2 "TESTPOINT_WHITE" TestPointVia 49.53,90.362 r90 top (schematic designator TP2)
DDS3_TP3 "TESTPOINT_WHITE" TestPointVia 26.924,88.711 r90 top (schematic designator TP3)
DDS3_TP4 "TESTPOINT_WHITE" TestPointVia 24.13,95.061 r0 top (schematic designator TP4)
DDS3_TP5 "TESTPOINT_WHITE" TestPointVia 22.987,97.982 r0 top (schematic designator TP5)
DDS3_TP6 "TESTPOINT_WHITE" TestPointVia 21.844,100.649 r0 top (schematic designator TP6)
DDS3_TP7 "TESTPOINT_WHITE" TestPointVia 96.774,96.331 r90 top (schematic designator TP7)
DDS3_TP8 "TESTPOINT_WHITE" TestPointVia 96.774,89.6 r90 top (schematic designator TP8)
DDS3_TP9 "TESTPOINT_WHITE" TestPointVia 61.595,100.649 r90 top (schematic designator TP9)
DDS3_TP10 "TESTPOINT_WHITE" TestPointVia 63.627,92.267 r90 top (schematic designator TP10)
DDS3_U1 "AD9833BRMZ" ADI-RM-10_M 31.385,98.177 r270 top (schematic designator U1)
DDS3_U2 "OPA2188AIDR" D0008A_L 72.771,98.679 r0 top (schematic designator U2)
DDS3_U3 "OPA2188AIDR" D0008A_L 41.656,90.886 r0 top (schematic designator U3)
DDS3_U4 "AD8476ARMZ" SOP65P490X110-8N 56.769,91.567 r90 top (schematic designator U4)
DDS3_U5 "OPA2188AIDR" D0008A_L 72.263,86.741 r0 top (schematic designator U5)
DDS3_U9 "OPA2188AIDR" D0008A_L 48.26,97.093 r270 top (schematic designator U9)
DDS4_C1 "220pF" 1608[0603] 36.957,138.811 r90 top (schematic designator C1)
DDS4_C2 "1u" 1608[0603] 45.085,136.017 r0 top (schematic designator C2)
DDS4_C3 "2.2nF" 1608[0603] 36.449,143.191 r180 top (schematic designator C3)
DDS4_C4 "0.1uF" 1608[0603] 28.926,147.329 r270 top (schematic designator C4)
DDS4_C5 "0.1uF" 1608[0603] 44.007,143.572 r0 top (schematic designator C5)
DDS4_C6 "0.1uF" 1608[0603] 40.324,136.46 r180 top (schematic designator C6)
DDS4_C7 "0.1uF" 1608[0603] 75.057,151.573 r0 top (schematic designator C7)
DDS4_C8 "0.1uF" 1608[0603] 71.501,144.334 r180 top (schematic designator C8)
DDS4_C9 "0.1uF" 1608[0603] 74.549,139.635 r0 top (schematic designator C9)
DDS4_C10 "0.1uF" 1608[0603] 71.12,132.142 r180 top (schematic designator C10)
DDS4_C11 "10nF" 1608[0603] 35.449,147.326 r90 top (schematic designator C11)
DDS4_C12 "0.1uF" 1608[0603] 36.973,147.326 r90 top (schematic designator C12)
DDS4_C13 "10uF" 1608[0603] 38.497,147.326 r90 top (schematic designator C13)
DDS4_C14 "0.1uF" 1608[0603] 54.737,137.222 r270 top (schematic designator C14)
DDS4_C15 "10uF" 1608[0603] 53.086,137.222 r270 top (schematic designator C15)
DDS4_C16 "0.1uF" 1608[0603] 54.737,141.54 r90 top (schematic designator C16)
DDS4_C17 "10uF" 1608[0603] 53.213,141.54 r90 top (schematic designator C17)
DDS4_C23 "0.1uF" 1608[0603] 53.213,144.399 r180 top (schematic designator C23)
DDS4_C24 "0.1uF" 1608[0603] 44.958,146.05 r90 top (schematic designator C24)
DDS4_P1 "Header 2" HDR1X2 94.615,143.256 r270 top (schematic designator P1)
DDS4_P2 "Header 4X2" HDR2X4 90.678,147.193 r180 top (schematic designator P2)
DDS4_P3 "Header 4X2" HDR2X4 83.058,136.906 r0 top (schematic designator P3)
DDS4_R1 "100K" 6-0805_M 66.024,149.795 r0 top (schematic designator R1)
DDS4_R2 "100K" 6-0805_M 78.867,144.842 r90 top (schematic designator R2)
DDS4_R3 "50k" 6-0805_M 83.058,150.749 r90 top (schematic designator R3)
DDS4_R4 "715" 6-0805_M 31.242,137.857 r0 top (schematic designator R4)
DDS4_R5 "13k" 6-0805_M 33.147,140.524 r0 top (schematic designator R5)
DDS4_R6 "10k" 6-0805_M 49.022,137.414 r180 top (schematic designator R6)
DDS4_R7 "100K" 6-0805_M 59.96,146.366 r0 top (schematic designator R7)
DDS4_R8 "100K" 6-0805_M 65.897,146.366 r180 top (schematic designator R8)
DDS4_R9 "100K" 6-0805_M 65.151,137.603 r0 top (schematic designator R9)
DDS4_R10 "100K" 6-0805_M 79.121,132.334 r0 top (schematic designator R10)
DDS4_R11 "20k" 6-0805_M 85.598,150.622 r270 top (schematic designator R11)
DDS4_R12 "100K" 6-0805_M 59.801,134.174 r0 top (schematic designator R12)
DDS4_R13 "100K" 6-0805_M 66.421,133.604 r270 top (schematic designator R13)
DDS4_R18 "10k" 6-0805_M 88.265,150.622 r270 top (schematic designator R18)
DDS4_R19 "5k" 6-0805_M 90.932,150.495 r270 top (schematic designator R19)
DDS4_R20 "5k" 6-0805_M 90.932,133.223 r90 top (schematic designator R20)
DDS4_R21 "10k" 6-0805_M 88.265,133.223 r90 top (schematic designator R21)
DDS4_R22 "20k" 6-0805_M 85.471,133.223 r90 top (schematic designator R22)
DDS4_R23 "50k" 6-0805_M 82.931,133.223 r270 top (schematic designator R23)
DDS4_R24 "10k" 6-0805_M 24.384,137.176 r270 top (schematic designator R24)
DDS4_R25 "10k" 6-0805_M 57.023,149.987 r180 top (schematic designator R25)
DDS4_R26 "10k" 6-0805_M 56.896,146.685 r270 top (schematic designator R26)
DDS4_R27 "10k" 6-0805_M 43.307,148.971 r180 top (schematic designator R27)
DDS4_R28 "10k" 6-0805_M 49.022,141.732 r0 top (schematic designator R28)
DDS4_TP1 "TESTPOINT_WHITE" TestPointVia 25.908,141.224 r90 top (schematic designator TP1)
DDS4_TP2 "TESTPOINT_WHITE" TestPointVia 50.038,139.573 r90 top (schematic designator TP2)
DDS4_TP3 "TESTPOINT_WHITE" TestPointVia 27.432,137.922 r90 top (schematic designator TP3)
DDS4_TP4 "TESTPOINT_WHITE" TestPointVia 24.638,144.272 r0 top (schematic designator TP4)
DDS4_TP5 "TESTPOINT_WHITE" TestPointVia 23.495,147.193 r0 top (schematic designator TP5)
DDS4_TP6 "TESTPOINT_WHITE" TestPointVia 22.352,149.86 r0 top (schematic designator TP6)
DDS4_TP7 "TESTPOINT_WHITE" TestPointVia 97.282,145.542 r90 top (schematic designator TP7)
DDS4_TP8 "TESTPOINT_WHITE" TestPointVia 97.282,138.811 r90 top (schematic designator TP8)
DDS4_TP9 "TESTPOINT_WHITE" TestPointVia 62.103,149.86 r90 top (schematic designator TP9)
DDS4_TP10 "TESTPOINT_WHITE" TestPointVia 64.135,141.478 r90 top (schematic designator TP10)
DDS4_U1 "AD9833BRMZ" ADI-RM-10_M 31.893,147.388 r270 top (schematic designator U1)
DDS4_U2 "OPA2188AIDR" D0008A_L 73.279,147.89 r0 top (schematic designator U2)
DDS4_U3 "OPA2188AIDR" D0008A_L 42.164,140.097 r0 top (schematic designator U3)
DDS4_U4 "AD8476ARMZ" SOP65P490X110-8N 57.277,140.778 r90 top (schematic designator U4)
DDS4_U5 "OPA2188AIDR" D0008A_L 72.771,135.952 r0 top (schematic designator U5)
DDS4_U9 "OPA2188AIDR" D0008A_L 48.768,146.304 r270 top (schematic designator U9)
DDS5_C1 "220pF" 1608[0603] 36.957,162.941 r90 top (schematic designator C1)
DDS5_C2 "1u" 1608[0603] 45.085,160.274 r0 top (schematic designator C2)
DDS5_C3 "2.2nF" 1608[0603] 36.449,167.321 r180 top (schematic designator C3)
DDS5_C4 "0.1uF" 1608[0603] 28.926,171.459 r270 top (schematic designator C4)
DDS5_C5 "0.1uF" 1608[0603] 44.007,167.702 r0 top (schematic designator C5)
DDS5_C6 "0.1uF" 1608[0603] 40.324,160.59 r180 top (schematic designator C6)
DDS5_C7 "0.1uF" 1608[0603] 75.057,175.703 r0 top (schematic designator C7)
DDS5_C8 "0.1uF" 1608[0603] 71.501,168.464 r180 top (schematic designator C8)
DDS5_C9 "0.1uF" 1608[0603] 74.549,163.765 r0 top (schematic designator C9)
DDS5_C10 "0.1uF" 1608[0603] 71.12,156.272 r180 top (schematic designator C10)
DDS5_C11 "10nF" 1608[0603] 35.449,171.456 r90 top (schematic designator C11)
DDS5_C12 "0.1uF" 1608[0603] 36.973,171.456 r90 top (schematic designator C12)
DDS5_C13 "10uF" 1608[0603] 38.497,171.456 r90 top (schematic designator C13)
DDS5_C14 "0.1uF" 1608[0603] 54.737,161.352 r270 top (schematic designator C14)
DDS5_C15 "10uF" 1608[0603] 53.086,161.352 r270 top (schematic designator C15)
DDS5_C16 "0.1uF" 1608[0603] 54.737,165.67 r90 top (schematic designator C16)
DDS5_C17 "10uF" 1608[0603] 53.213,165.67 r90 top (schematic designator C17)
DDS5_C23 "0.1uF" 1608[0603] 53.213,168.529 r180 top (schematic designator C23)
DDS5_C24 "0.1uF" 1608[0603] 44.958,170.18 r90 top (schematic designator C24)
DDS5_P1 "Header 2" HDR1X2 94.615,167.386 r270 top (schematic designator P1)
DDS5_P2 "Header 4X2" HDR2X4 90.678,171.323 r180 top (schematic designator P2)
DDS5_P3 "Header 4X2" HDR2X4 83.058,161.036 r0 top (schematic designator P3)
DDS5_R1 "100K" 6-0805_M 66.024,173.925 r0 top (schematic designator R1)
DDS5_R2 "100K" 6-0805_M 78.867,168.972 r90 top (schematic designator R2)
DDS5_R3 "50k" 6-0805_M 83.058,174.879 r90 top (schematic designator R3)
DDS5_R4 "715" 6-0805_M 31.242,161.987 r0 top (schematic designator R4)
DDS5_R5 "13k" 6-0805_M 33.147,164.654 r0 top (schematic designator R5)
DDS5_R6 "10k" 6-0805_M 48.895,161.671 r180 top (schematic designator R6)
DDS5_R7 "100K" 6-0805_M 59.96,170.496 r0 top (schematic designator R7)
DDS5_R8 "100K" 6-0805_M 65.897,170.496 r180 top (schematic designator R8)
DDS5_R9 "100K" 6-0805_M 65.151,161.733 r0 top (schematic designator R9)
DDS5_R10 "100K" 6-0805_M 79.121,156.464 r0 top (schematic designator R10)
DDS5_R11 "20k" 6-0805_M 85.598,174.752 r270 top (schematic designator R11)
DDS5_R12 "100K" 6-0805_M 59.801,158.304 r0 top (schematic designator R12)
DDS5_R13 "100K" 6-0805_M 66.421,157.734 r270 top (schematic designator R13)
DDS5_R18 "10k" 6-0805_M 88.265,174.752 r270 top (schematic designator R18)
DDS5_R19 "5k" 6-0805_M 90.932,174.625 r270 top (schematic designator R19)
DDS5_R20 "5k" 6-0805_M 90.932,157.353 r90 top (schematic designator R20)
DDS5_R21 "10k" 6-0805_M 88.265,157.353 r90 top (schematic designator R21)
DDS5_R22 "20k" 6-0805_M 85.471,157.353 r90 top (schematic designator R22)
DDS5_R23 "50k" 6-0805_M 82.931,157.353 r270 top (schematic designator R23)
DDS5_R24 "10k" 6-0805_M 24.384,161.306 r270 top (schematic designator R24)
DDS5_R25 "10k" 6-0805_M 57.023,174.244 r180 top (schematic designator R25)
DDS5_R26 "10k" 6-0805_M 56.896,171.069 r270 top (schematic designator R26)
DDS5_R27 "10k" 6-0805_M 43.307,173.101 r180 top (schematic designator R27)
DDS5_R28 "10k" 6-0805_M 49.022,165.862 r0 top (schematic designator R28)
DDS5_TP1 "TESTPOINT_WHITE" TestPointVia 25.908,165.354 r90 top (schematic designator TP1)
DDS5_TP2 "TESTPOINT_WHITE" TestPointVia 50.038,163.703 r90 top (schematic designator TP2)
DDS5_TP3 "TESTPOINT_WHITE" TestPointVia 27.432,162.052 r90 top (schematic designator TP3)
DDS5_TP4 "TESTPOINT_WHITE" TestPointVia 24.638,168.402 r0 top (schematic designator TP4)
DDS5_TP5 "TESTPOINT_WHITE" TestPointVia 23.495,171.323 r0 top (schematic designator TP5)
DDS5_TP6 "TESTPOINT_WHITE" TestPointVia 22.352,173.99 r0 top (schematic designator TP6)
DDS5_TP7 "TESTPOINT_WHITE" TestPointVia 97.282,169.672 r90 top (schematic designator TP7)
DDS5_TP8 "TESTPOINT_WHITE" TestPointVia 97.282,162.941 r90 top (schematic designator TP8)
DDS5_TP9 "TESTPOINT_WHITE" TestPointVia 62.103,173.99 r90 top (schematic designator TP9)
DDS5_TP10 "TESTPOINT_WHITE" TestPointVia 64.135,165.608 r90 top (schematic designator TP10)
DDS5_U1 "AD9833BRMZ" ADI-RM-10_M 31.893,171.518 r270 top (schematic designator U1)
DDS5_U2 "OPA2188AIDR" D0008A_L 73.279,172.02 r0 top (schematic designator U2)
DDS5_U3 "OPA2188AIDR" D0008A_L 42.164,164.227 r0 top (schematic designator U3)
DDS5_U4 "AD8476ARMZ" SOP65P490X110-8N 57.277,164.908 r90 top (schematic designator U4)
DDS5_U5 "OPA2188AIDR" D0008A_L 72.771,160.082 r0 top (schematic designator U5)
DDS5_U9 "OPA2188AIDR" D0008A_L 48.768,170.434 r270 top (schematic designator U9)
DDS6_C1 "220pF" 1608[0603] 36.957,187.325 r90 top (schematic designator C1)
DDS6_C2 "1u" 1608[0603] 44.958,184.658 r0 top (schematic designator C2)
DDS6_C3 "2.2nF" 1608[0603] 36.449,191.705 r180 top (schematic designator C3)
DDS6_C4 "0.1uF" 1608[0603] 28.926,195.843 r270 top (schematic designator C4)
DDS6_C5 "0.1uF" 1608[0603] 44.007,192.086 r0 top (schematic designator C5)
DDS6_C6 "0.1uF" 1608[0603] 40.324,184.974 r180 top (schematic designator C6)
DDS6_C7 "0.1uF" 1608[0603] 75.057,200.087 r0 top (schematic designator C7)
DDS6_C8 "0.1uF" 1608[0603] 71.501,192.848 r180 top (schematic designator C8)
DDS6_C9 "0.1uF" 1608[0603] 74.549,188.149 r0 top (schematic designator C9)
DDS6_C10 "0.1uF" 1608[0603] 71.12,180.656 r180 top (schematic designator C10)
DDS6_C11 "10nF" 1608[0603] 35.449,195.84 r90 top (schematic designator C11)
DDS6_C12 "0.1uF" 1608[0603] 36.973,195.84 r90 top (schematic designator C12)
DDS6_C13 "10uF" 1608[0603] 38.497,195.84 r90 top (schematic designator C13)
DDS6_C14 "0.1uF" 1608[0603] 54.737,185.736 r270 top (schematic designator C14)
DDS6_C15 "10uF" 1608[0603] 53.086,185.736 r270 top (schematic designator C15)
DDS6_C16 "0.1uF" 1608[0603] 54.737,190.054 r90 top (schematic designator C16)
DDS6_C17 "10uF" 1608[0603] 53.213,190.054 r90 top (schematic designator C17)
DDS6_C23 "0.1uF" 1608[0603] 53.213,192.913 r180 top (schematic designator C23)
DDS6_C24 "0.1uF" 1608[0603] 44.958,194.564 r90 top (schematic designator C24)
DDS6_P1 "Header 2" HDR1X2 94.615,191.77 r270 top (schematic designator P1)
DDS6_P2 "Header 4X2" HDR2X4 90.678,195.707 r180 top (schematic designator P2)
DDS6_P3 "Header 4X2" HDR2X4 83.058,185.42 r0 top (schematic designator P3)
DDS6_R1 "100K" 6-0805_M 66.024,198.309 r0 top (schematic designator R1)
DDS6_R2 "100K" 6-0805_M 78.867,193.356 r90 top (schematic designator R2)
DDS6_R3 "50k" 6-0805_M 83.058,199.263 r90 top (schematic designator R3)
DDS6_R4 "715" 6-0805_M 31.242,186.371 r0 top (schematic designator R4)
DDS6_R5 "13k" 6-0805_M 33.147,189.038 r0 top (schematic designator R5)
DDS6_R6 "10k" 6-0805_M 49.276,186.055 r180 top (schematic designator R6)
DDS6_R7 "100K" 6-0805_M 59.96,194.88 r0 top (schematic designator R7)
DDS6_R8 "100K" 6-0805_M 65.897,194.88 r180 top (schematic designator R8)
DDS6_R9 "100K" 6-0805_M 65.151,186.117 r0 top (schematic designator R9)
DDS6_R10 "100K" 6-0805_M 79.121,180.848 r0 top (schematic designator R10)
DDS6_R11 "20k" 6-0805_M 85.598,199.136 r270 top (schematic designator R11)
DDS6_R12 "100K" 6-0805_M 59.801,182.688 r0 top (schematic designator R12)
DDS6_R13 "100K" 6-0805_M 66.421,182.118 r270 top (schematic designator R13)
DDS6_R18 "10k" 6-0805_M 88.265,199.136 r270 top (schematic designator R18)
DDS6_R19 "5k" 6-0805_M 90.932,199.009 r270 top (schematic designator R19)
DDS6_R20 "5k" 6-0805_M 90.932,181.864 r90 top (schematic designator R20)
DDS6_R21 "10k" 6-0805_M 88.265,181.737 r90 top (schematic designator R21)
DDS6_R22 "20k" 6-0805_M 85.471,181.737 r90 top (schematic designator R22)
DDS6_R23 "50k" 6-0805_M 82.931,181.864 r270 top (schematic designator R23)
DDS6_R24 "10k" 6-0805_M 24.384,185.69 r270 top (schematic designator R24)
DDS6_R25 "10k" 6-0805_M 57.023,198.501 r180 top (schematic designator R25)
DDS6_R26 "10k" 6-0805_M 56.896,195.072 r270 top (schematic designator R26)
DDS6_R27 "10k" 6-0805_M 43.307,197.485 r180 top (schematic designator R27)
DDS6_R28 "10k" 6-0805_M 49.022,190.246 r0 top (schematic designator R28)
DDS6_TP1 "TESTPOINT_WHITE" TestPointVia 25.908,189.738 r90 top (schematic designator TP1)
DDS6_TP2 "TESTPOINT_WHITE" TestPointVia 50.038,188.087 r90 top (schematic designator TP2)
DDS6_TP3 "TESTPOINT_WHITE" TestPointVia 27.432,186.436 r90 top (schematic designator TP3)
DDS6_TP4 "TESTPOINT_WHITE" TestPointVia 24.638,192.786 r0 top (schematic designator TP4)
DDS6_TP5 "TESTPOINT_WHITE" TestPointVia 23.495,195.707 r0 top (schematic designator TP5)
DDS6_TP6 "TESTPOINT_WHITE" TestPointVia 22.352,198.374 r0 top (schematic designator TP6)
DDS6_TP7 "TESTPOINT_WHITE" TestPointVia 97.282,194.056 r90 top (schematic designator TP7)
DDS6_TP8 "TESTPOINT_WHITE" TestPointVia 97.282,187.325 r90 top (schematic designator TP8)
DDS6_TP9 "TESTPOINT_WHITE" TestPointVia 62.103,198.374 r90 top (schematic designator TP9)
DDS6_TP10 "TESTPOINT_WHITE" TestPointVia 64.135,189.992 r90 top (schematic designator TP10)
DDS6_U1 "AD9833BRMZ" ADI-RM-10_M 31.893,195.902 r270 top (schematic designator U1)
DDS6_U2 "OPA2188AIDR" D0008A_L 73.279,196.404 r0 top (schematic designator U2)
DDS6_U3 "OPA2188AIDR" D0008A_L 42.164,188.611 r0 top (schematic designator U3)
DDS6_U4 "AD8476ARMZ" SOP65P490X110-8N 57.277,189.292 r90 top (schematic designator U4)
DDS6_U5 "OPA2188AIDR" D0008A_L 72.771,184.466 r0 top (schematic designator U5)
DDS6_U9 "OPA2188AIDR" D0008A_L 48.768,194.818 r270 top (schematic designator U9)
DS1 "TLMS1100-GS08" VISH-TLMX1100_V 75.565,107.569 r180 top
DS2 "TLMS1100-GS08" VISH-TLMX1100_V 76.454,120.523 r270 top
J1 "ZX62D-AB-5P8" HIRO-ZX62D-AB-5P8_V 98.006,111.386 r90 top
J*1 "JST" "JST- S2B-PH-SM4-TB(LF)(SN)-2_V" 94.488,123.063 r90 top
R14 "2k" 6-0805_M 80.788,115.443 r0 top
R15 "330" 6-0805_M 76.454,124.841 r90 top
R16 "330" 6-0805_M 85.725,110.379 r90 top
R17 "20k" 6-0805_M 54.102,112.665 r270 top
S1 "SW-SPST" SPST-2 81.534,123.063 r90 top
TP11 "TESTPOINT_WHITE" TestPointVia 62.992,127 r90 top
TP12 "TESTPOINT_WHITE" TestPointVia 53.975,127.127 r90 top
TP13 "TESTPOINT_WHITE" TestPointVia 58.547,127 r90 top
U6 "MCP73831T-2ADI/OT" SOT-23-OT5_M 80.956,111.44 r0 top
U7 "LTC1044ACS8" LT-S8-8_M 66.294,121.412 r0 top
U8 "LTC6900IS5#PBF" LT-TSOT-23-5_V 59.182,112.522 r0 top

## Footprints (in the part's own frame and the unit in brackets; to place one, negate y for a bottom-side part, rotate by r counter-clockwise, add the part's x,y. Pads: shape width x height; smd on the part's side, far side on the other; paste and mask are expansions set on the pad)
6-0805_M [mm] "Chip Resistor, Body 2.0x1.2mm, IPC Low Density"
  rect 1.4x1.5 smd: 1(-1,0) 2(1,0)
  silkscreen extent 0,-0.65 0,0.65, body extent -1.07,-0.7 1.07,0.7, height 0.7
1608[0603] [mm] "Chip Capacitor, Body 1.6x0.8mm, IPC High Density"
  rect 0.8x0.9 smd: 1(-0.7,0) 2(0.7,0)
  body extent -0.87,-0.48 0.87,0.48, height 1.3
ADI-RM-10_M [mm] "TSSOP, 10-Leads, Body 3x3mm, Pitch 0.5mm, IPC Low Density"
  oval 2x0.3 smd: 1(-2.1,1) 2(-2.1,0.5) 3(-2.1,0) 4(-2.1,-0.5) 5(-2.1,-1) 6(2.1,-1) 7(2.1,-0.5) 8(2.1,0) 9(2.1,0.5) 10(2.1,1)
  silkscreen extent -2.22,-1.55 0.7,1.83, body extent -1.55,-1.55 1.55,1.55, height 1.1
D0008A_L [mm] "SOIC, 8-Leads, Body 5x4mm, Pitch 1.27mm, IPC High Density"
  rrect18% 1.25x0.55 smd: 1(-2.625,1.905) 2(-2.625,0.635) 3(-2.625,-0.635) 4(-2.625,-1.905) 5(2.625,-1.905) 6(2.625,-0.635) 7(2.625,0.635) 8(2.625,1.905)
  silkscreen extent -2.75,-2.5 1.6,2.85, body extent -3,-2.45 3,2.45, height 1.63
HDR1X2 [mm] "Connector; Header; 2 Position"
  rect 1.5x1.5 hole 0.9: 1(0,0)
  round 1.5 hole 0.9: 2(2.54,0)
  silkscreen extent -1.27,-1.27 3.81,1.27
HDR2X4 [mm] "Connector; Header; 4x2 Position"
  rect 1.5x1.5 hole 0.9: 1(0,0)
  round 1.5 hole 0.9: 2(0,2.54) 3(2.54,0) 4(2.54,2.54) 5(5.08,0) 6(5.08,2.54) 7(7.62,0) 8(7.62,2.54)
  silkscreen extent -1.27,-1.27 8.89,3.81
HIRO-ZX62D-AB-5P8_V [mm] "USB Micro-AB Connector, 5-Leads, Pitch 0.65mm"
  rect 0.4x1.35 smd: 1(-1.3,1.238) 2(-0.65,1.238) 3(0,1.238) 4(0.65,1.238) 5(1.3,1.238)
  oval 1.05x1.25 hole 0.65 slot 0.85 at 90 deg: 6(2.225,1.563) 11(-2.225,1.563)
  oval 1.225x1.9 hole 0.825 slot 1.5 at 90 deg: 7(4.088,-1.562) 10(-4.088,-1.562)
  rect 1.8x1.9 smd: 8(1.15,-1.562) 9(-1.15,-1.562)
  Top Layer region: 2.6,-2.512 4.088,-2.512 4.088,-0.612 2.6,-0.612
  Top Layer region: -4.088,-2.513 -2.6,-2.513 -2.6,-0.613 -4.088,-0.613
  Top Layer keep-out region: -3.75,-0.602 -1.7,-0.602 -1.7,0.413 -3.75,0.413
  Top Layer keep-out region: -1.7,-0.603 1.7,-0.603 1.7,0.212 -1.7,0.212
  Top Layer keep-out region: 1.7,-0.603 3.75,-0.603 3.75,0.413 1.7,0.413
  Top Layer keep-out region: -3.749,-2.887 3.751,-2.887 3.751,-2.522 -3.749,-2.522
  Top Layer keep-out region: -2.59,-2.522 -2.06,-2.522 -2.06,-0.602 -2.59,-0.602
  Top Layer keep-out region: -0.24,-2.524 0.24,-2.524 0.24,-0.604 -0.24,-0.604
  Top Layer keep-out region: 2.59,-0.602 2.06,-0.602 2.06,-2.522 2.59,-2.522
  silkscreen extent -3.75,0.91 3.75,2.59, body extent -4.37,-4.19 4.37,1.86, height 2.83
"JST- S2B-PH-SM4-TB(LF)(SN)-2_V" [mm] "SMD, 2-Leads, Body 7.9x7.6mm, Pitch 2mm"
  rect 1x3.5 smd: 1(-1,3.45) 2(1,3.45)
  rect 1.5x3.4 smd: MP1(-3.35,-2.3) MP2(3.35,-2.3)
  silkscreen extent -3.95,-3.8 3.95,5.87, body extent -3.95,-3.8 3.95,4.8, height 5.6
LT-S8-8_M [mm] "SOIC, 8-Leads, Body 5x4mm, Pitch 1.27mm, IPC Low Density"
  oval 2.5x0.7 smd: 1(-2.45,1.905) 2(-2.45,0.635) 3(-2.45,-0.635) 4(-2.45,-1.905) 5(2.45,-1.905) 6(2.45,-0.635) 7(2.45,0.635) 8(2.45,1.905)
  silkscreen extent -2.57,-2.5 0.8,2.93, body extent -2,-2.5 2,2.5, height 1.76
LT-TSOT-23-5_V [mm] "SOT23, 5-Leads, Body 2.90x1.75mm, Pitch 0.95mm"
  rect 1.22x0.62 smd: 1(-1.31,0.95) 2(-1.31,0) 3(-1.31,-0.95) 4(1.31,-0.95) 5(1.31,0.95)
  silkscreen extent -1.43,-1.45 0.3,1.93, body extent -1.4,-1.45 1.4,1.45, height 1
Pro_Micro [mil]
  round 70 hole 40: 1(0,6100) 2(0,6000) 3(0,5900) 4(0,5800) 5(0,5700) 6(0,5600) 7(0,5500) 8(0,5400) 9(0,5300) 10(0,5200) 11(0,5100) 12(0,5000) 13(600,6100) 14(600,6000) 15(600,5900) 16(600,5800) 17(600,5700) 18(600,5600) 19(600,5500) 20(600,5400) 21(600,5300) 22(600,5200) 23(600,5100) 24(600,5000)
SOP65P490X110-8N [mil]
  rect 59x17 smd: 1(-86,38) 2(-86,13) 3(-86,-13) 4(-86,-38) 5(86,-38) 6(86,-13) 7(86,13) 8(86,38)
  silkscreen extent -63,-63 63,63
SOT-23-OT5_M [mm] "SOT23, 5-Leads, Body 2.9x1.7mm, Pitch 0.95mm, Lead Span 2.8mm, IPC Low Density"
  rect 1.3x0.7 smd: 1(-1.2,0.95) 2(-1.2,0) 3(-1.2,-0.95) 4(1.2,-0.95) 5(1.2,0.95)
  silkscreen extent -1.32,-1.55 0.15,1.97, body extent -0.9,-1.55 0.9,1.55, height 1.45
SPST-2 [mm] "Switch; 2 Leads"
  rect 1.85x1.85 hole 1.1: 1(-2.54,0)
  round 1.85 hole 1.1: 2(2.54,0)
  silkscreen extent -4.89,-1.27 4.28,1.27
TestPointVia [mil]
  round 60 hole 39.37: 1(0,0)
VISH-TLMX1100_V [mm] "SMD, 2-Leads, Body 1.6x0.8mm"
  rect 0.6x0.8 smd: 1(-0.725,0) 2(0.725,0)
  silkscreen extent 1.53,-0.4 1.53,0.4, body extent -0.8,-0.4 0.8,0.4, height 0.65